# Altium PCB 中继板子.PcbDoc
Units mil, origin at the board's own origin, x right, y up, seen from the top; angles counter-clockwise.
Board outline 2494.03 x 3012.03 mil, 2 copper layers (Top Layer, Bottom Layer); 33 components, 49 nets, 200 pads, 73 vias.
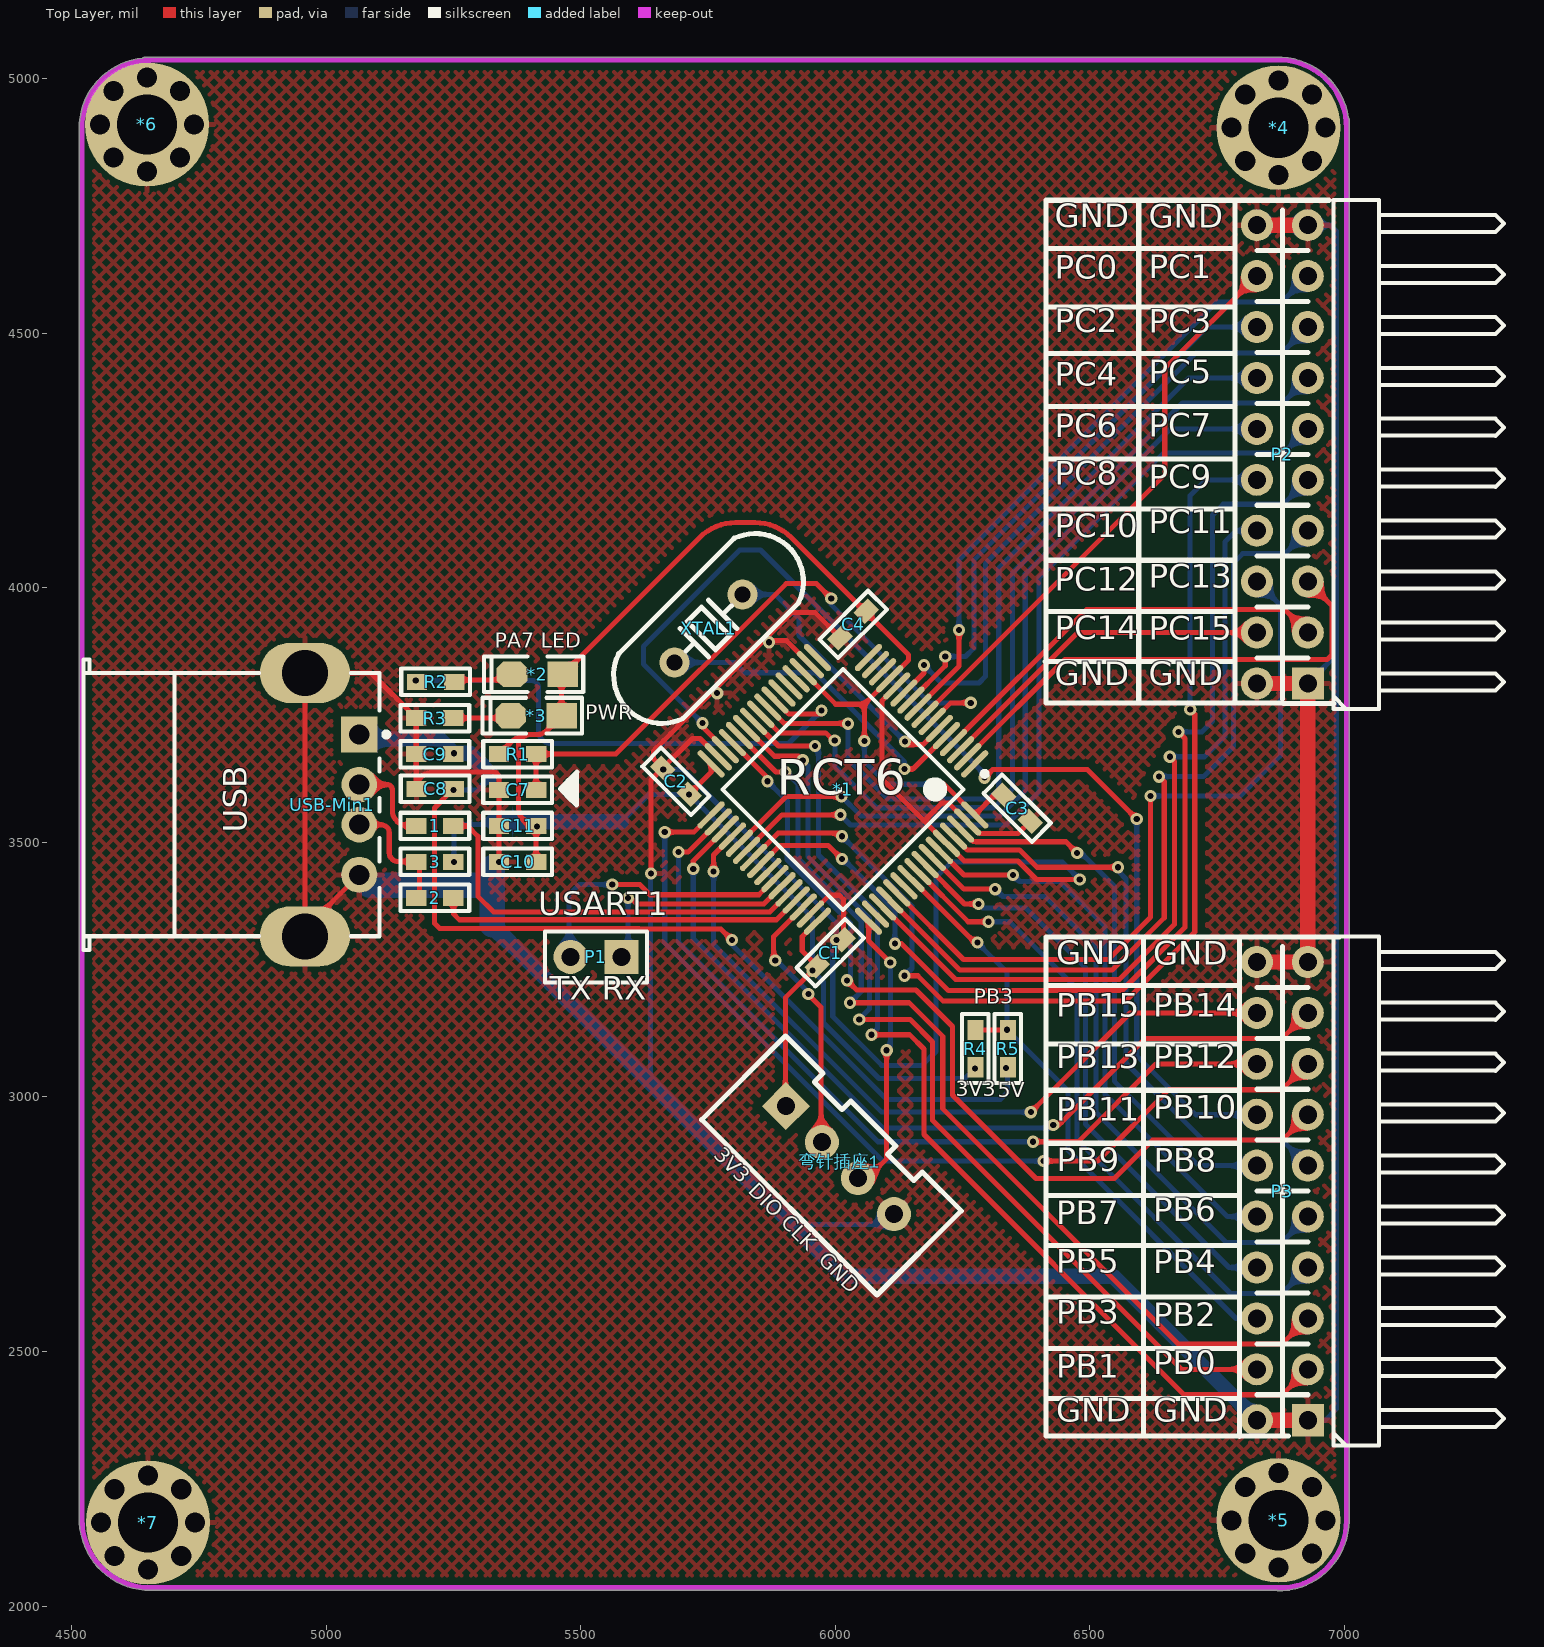
[diagram p0: Top Layer view]
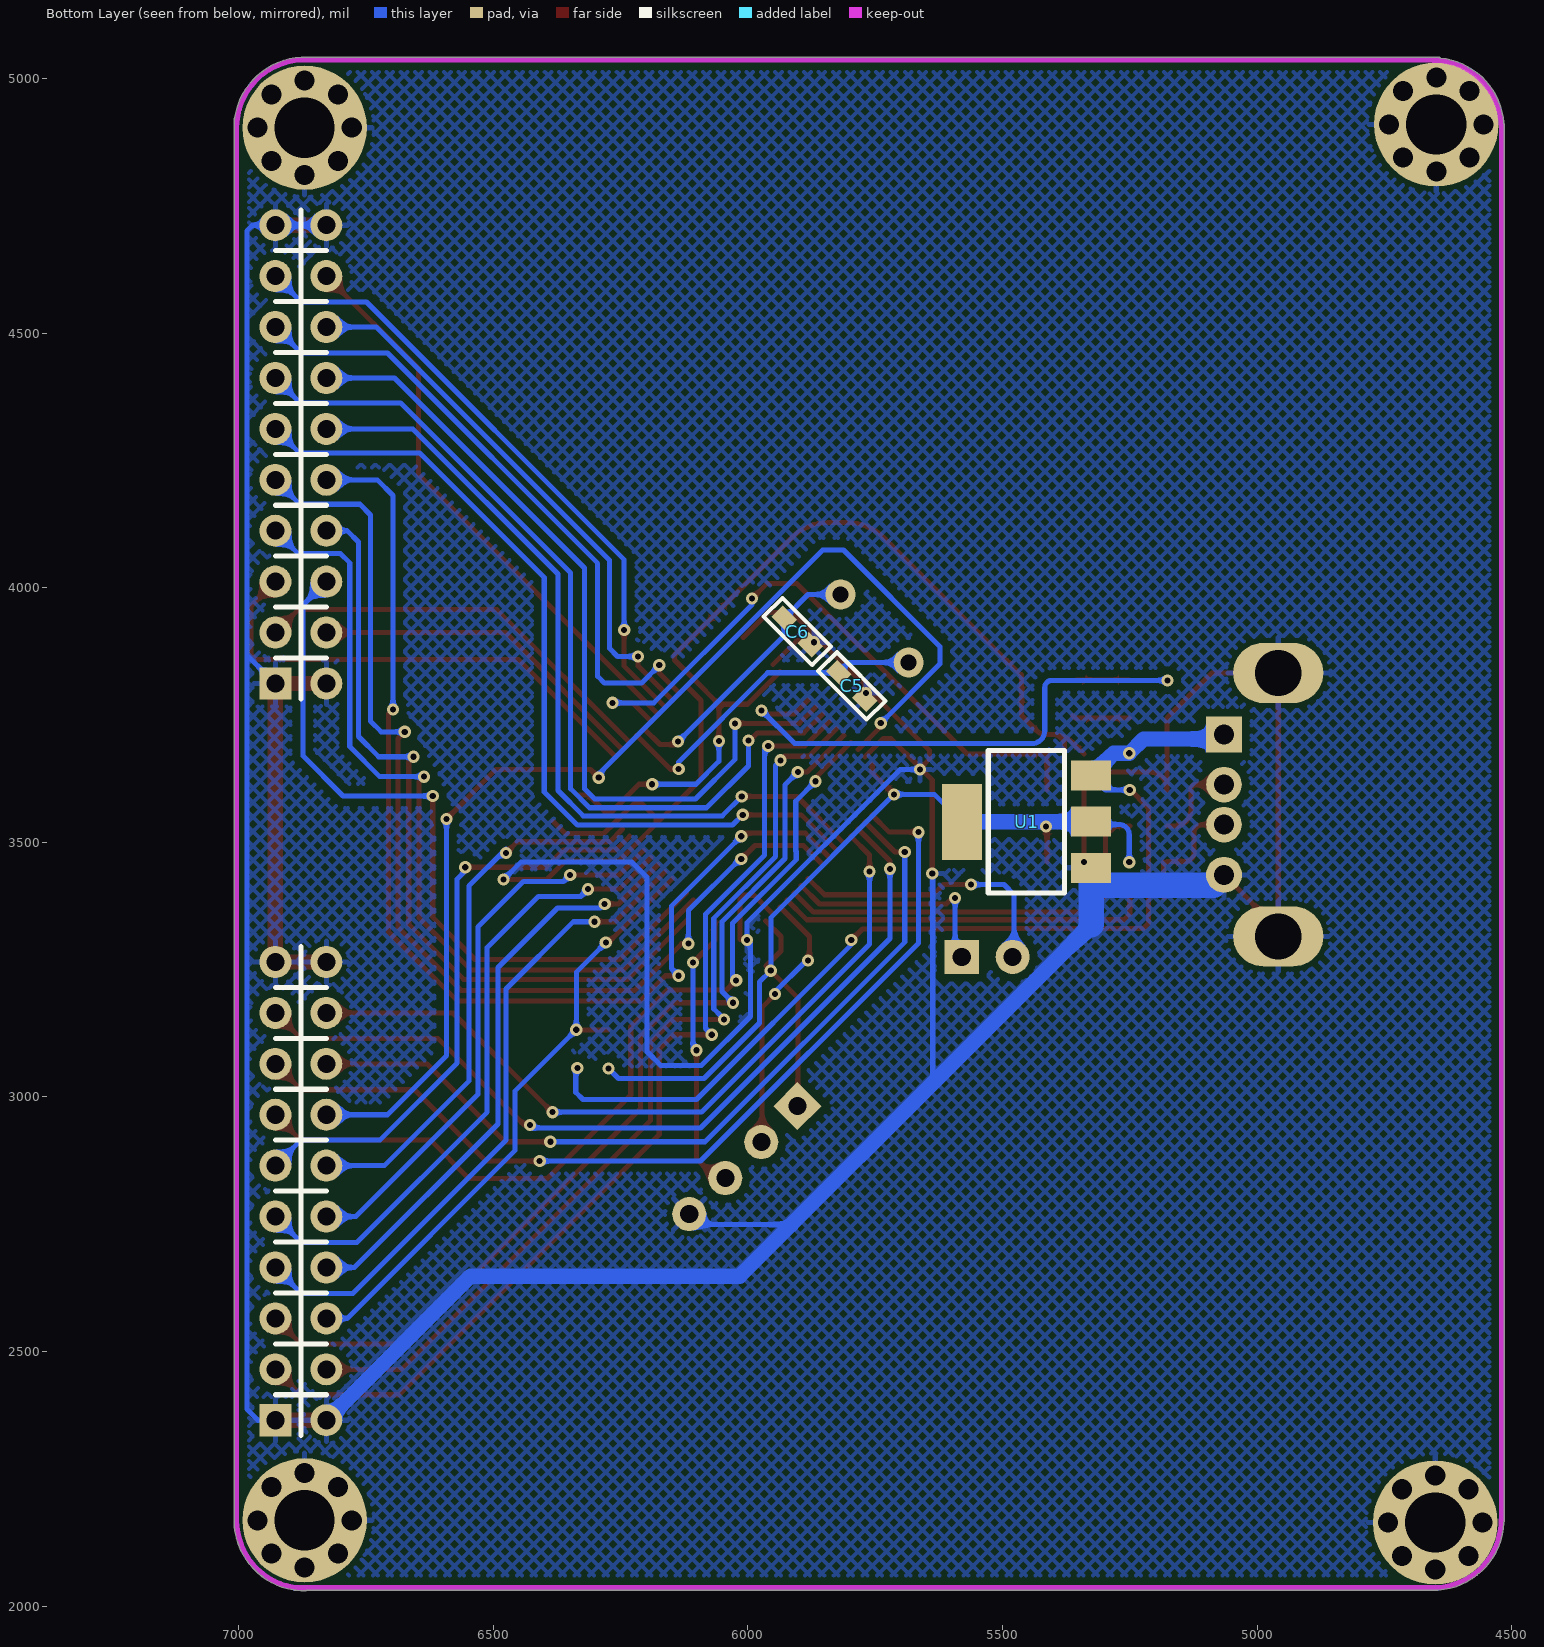
[diagram p1: Bottom Layer view, seen from below]

## Layer stack, top to bottom
Top Solder: solder mask 0.4, Solder Resist, Dk 3.5
Top Layer: signal copper 1.4
Dielectric 1: dielectric 12.6, FR-4, Dk 4.8
Bottom Layer: signal copper 1.4
Bottom Solder: solder mask 0.4, Solder Resist, Dk 3.5

## Board outline
4653.4,2030.98 ccw(c4653.42,2036) 4653.42,2030.98 6867,2030.98 ccw(c6870,2035) 6869.98,2029.99 ccw(c6870.5,2168.5) 6887.11,2030.98 6890,2030.98 ccw(c6890,2036) 6892.7,2031.78 ccw(c6870.5,2168.5) 7009,2166.66 ccw(c7004,2167) 7009.02,2167 7009.01,4902.97 7009.01,4920 ccw(c7004,4920) 7007.56,4923.53 ccw(c6870.5,4903.5) 6877.28,5041.85 ccw(c6876,5037) 6876,5042.02 4644,5042.02 ccw(c4644,5037) 4640.3,5040.39 ccw(c4653.5,4902.5) 4515.38,4912.95 ccw(c4520,4911) 4514.98,4911 4514.98,2166 ccw(c4520,2166) 4515.53,2163.74 ccw(c4653.92,2169.5) 4644.18,2031.33 ccw(c4646,2036)

## Design rules (kind name [scope] priority, off if disabled: settings)
Clearance [All] p1: gap=15
PolygonConnect [All] p1: connectstyle=Relief reliefconductorwidth=10 reliefentries=4 polygonreliefangle="90 Angle" airgapwidth=10
RoutingVias [All] p1: holewidth=12 width=24 viastyle="Through Hole" minholewidth=12 minwidth=24 maxholewidth=12 maxwidth=24
SolderMaskExpansion [All] p1: expansion=4
Width [All] p1: maxlimit=10 minlimit=10 preferedwidth=10
30 further rules are at their usual default settings.

## Components (designator, comment, footprint, x,y, rotation, side; value= is the part's Value field where it differs from the comment)
1 "22R" "R 0603" 5213.5,3532.14 r0 top
2 "22R" "R 0603" 5213.5,3390.91 r0 top
3 "Res" "R 0603" 5213.5,3461.52 r180 top
*1 "stm32F103RCT6" LQF64 6015,3604 r225 top
*2 "LED1" "LED 0805B" 5415,3830 r180 top
*3 "LED" "LED 0805B" 5412.5,3749 r180 top
*4 "定位孔" 定位孔 6870.5,4903.5 r0 top
*5 "定位孔" 定位孔 6870.5,2168.5 r0 top
*6 "定位孔" 定位孔 4648,4910 r0 top
*7 "定位孔" 定位孔 4650,2164 r0 top
C1 "104" "R 0603" 5990,3283 r225 top
C2 "104" "R 0603" 5687,3620 r315 top
C3 "104" "R 0603" 6357,3567 r135 top
C4 "104" "R 0603" 6035,3928 r45 top
C5 "22p" "R 0603" 5796,3807.22 r225 bottom
C6 "22p" "R 0603" 5903,3914 r225 bottom
C7 "Cap" "R 0603" 5376,3603 r0 top
C8 "Cap" "R 0603" 5214,3605 r0 top
C9 "Cap" "R 0603" 5213.5,3673.38 r0 top
C10 "Cap" "R 0603" 5376,3461.52 r0 top
C11 "Cap" "R 0603" 5376,3532.14 r0 top
P1 "Header 2" HDR-1x2 5580,3275 r180 top
P2 "Header 10X2" HDR-10X2_H 6928,3812 r90 top
P3 "Header 10X2" HDR-10X2_H 6928,2365 r90 top
R1 "Res2" "R 0603" 5376,3673.38 r0 top
R2 "1k" "R 0603" 5215,3815 r180 top
R3 "1k" "R 0603" 5213.5,3744 r180 top
R4 "Res2" "R 0603" 6275,3095 r270 top
R5 "Res2" "R 0603" 6339,3095 r270 top
U1 "AMS1117" AMS1117 5456,3540 r90 bottom
USB-Min1 "USB-Mini" USB-A/S_A 5065,3574 r180 top
XTAL1 "8M" "XTAL-49S DIP" 5751,3920 r225 top
弯针插座1 "弯针插座4p" XH2.54-4P 5903,2982 r315 top

## Footprints (in the part's own frame and the unit in brackets; to place one, negate y for a bottom-side part, rotate by r counter-clockwise, add the part's x,y. Pads: shape width x height; smd on the part's side, far side on the other; paste and mask are expansions set on the pad)
AMS1117 [mil]
  rect 59x79 smd: 1(-90,-130) 2(0.55,-130) 3(91.1,-130)
  rect 150x79 smd: 4(-0.12,123.54)
  silkscreen extent -139,-78 141,72
HDR-1x2 [mm] "排针，2脚"
  rect 1.7x1.7 hole 0.9: 1(0,0)
  round 1.7 hole 0.9: 2(2.54,0)
  silkscreen extent -1.27,-1.27 3.81,1.27, body extent -1.27,-1.27 3.81,1.27, height 8.5
HDR-10X2_H [mm]
  rect 1.6x1.6 hole 0.9: 1(0,0)
  round 1.6 hole 0.9: 2(0,2.54) 3(2.54,0) 4(2.54,2.54) 5(5.08,0) 6(5.08,2.54) 7(7.62,0) 8(7.62,2.54) 9(10.16,0) 10(10.16,2.54) 11(12.7,0) 12(12.7,2.54) 13(15.24,0) 14(15.24,2.54) 15(17.78,0) 16(17.78,2.54) 17(20.32,0) 18(20.32,2.54) 19(22.86,0) 20(22.86,2.54)
  silkscreen extent -1.27,-9.79 24.13,2.54, body extent -1.27,-9.96 24.13,2.89, height 5.1
"LED 0805B" [mil] "蓝色0805LED"
  rect 60x50 smd: 1(-50,0)
  oct 60x50 smd: 2(50,0)
  silkscreen extent -90,-35 105,35, body extent -39,-25 39,25, height 32
LQF64 [mm]
  oval 1.8x0.3 smd: 1(-5.55,3.75) 2(-5.55,3.25) 3(-5.55,2.75) 4(-5.55,2.25) 5(-5.55,1.75) 6(-5.55,1.25) 7(-5.55,0.75) 8(-5.55,0.25) 9(-5.55,-0.25) 10(-5.55,-0.75) 11(-5.55,-1.25) 12(-5.55,-1.75) 13(-5.55,-2.25) 14(-5.55,-2.75) 15(-5.55,-3.25) 16(-5.55,-3.75) 33(5.55,-3.75) 34(5.55,-3.25) 35(5.55,-2.75) 36(5.55,-2.25) 37(5.55,-1.75) 38(5.55,-1.25) 39(5.55,-0.75) 40(5.55,-0.25) 41(5.55,0.25) 42(5.55,0.75) 43(5.55,1.25) 44(5.55,1.75) 45(5.55,2.25) 46(5.55,2.75) 47(5.55,3.25) 48(5.55,3.75)
  oval 0.3x1.8 smd: 17(-3.75,-5.55) 18(-3.25,-5.55) 19(-2.75,-5.55) 20(-2.25,-5.55) 21(-1.75,-5.55) 22(-1.25,-5.55) 23(-0.75,-5.55) 24(-0.25,-5.55) 25(0.25,-5.55) 26(0.75,-5.55) 27(1.25,-5.55) 28(1.75,-5.55) 29(2.25,-5.55) 30(2.75,-5.55) 31(3.25,-5.55) 32(3.75,-5.55) 49(3.75,5.55) 50(3.25,5.55) 51(2.75,5.55) 52(2.25,5.55) 53(1.75,5.55) 54(1.25,5.55) 55(0.75,5.55) 56(0.25,5.55) 57(-0.25,5.55) 58(-0.75,5.55) 59(-1.25,5.55) 60(-1.75,5.55) 61(-2.25,5.55) 62(-2.75,5.55) 63(-3.25,5.55) 64(-3.75,5.55)
  silkscreen extent -5.67,-4.25 4.25,4.57, body extent -5,-5 5,5, height 1.6
"R 0603" [mil] "1/10W贴片电阻"
  rect 40x31.5 smd: 1(-36.5,0) 2(36.5,0)
  silkscreen extent -68,-26 68,26, body extent -31,-16 32,16, height 16
USB-A/S_A [mm] "A型直插母头，"
  rect 1.8x1.8 hole 1: 1(0,-3.5)
  round 1.778 hole 1: 2(0,-1) 3(0,1)
  round 1.8 hole 1: 4(0,3.5)
  oval 4.5x3 hole 2.3: 4(2.71,6.57) 4(2.71,-6.57)
  silkscreen extent -1.48,-7.25 13.75,7.25, body extent -0.6,-7.34 13.7,7.34, height 6.8
XH2.54-4P [mm] "接插件，4P"
  rect 1.7x1.7 hole 0.9: 1(0,0)
  round 1.7 hole 0.9: 2(2.54,0) 3(5.08,0) 4(7.62,0)
  silkscreen extent -2.49,-3.45 9.88,2.49, body extent -2.5,-3.3 10.12,2.4, height 7.03
"XTAL-49S DIP" [mm]
  round 1.5 hole 0.8: 1(-2.4,0) 2(2.4,0)
  silkscreen extent -5.7,-2.28 5.7,2.28, body extent -5.68,-2.35 5.67,2.3, height 3.5
定位孔 [mm]
  round 1 hole 1: 1(-2.35,0) 1(-1.662,-1.662) 1(-1.662,1.662) 1(0,-2.35) 1(0,2.35) 1(1.662,-1.662) 1(1.662,1.662) 1(2.35,0)
  round 6.2 hole 3: 1(0,0)

## Part data
1 2 R2 R3: library part Res
*2: library part LED
C1 C2 C3 C4: library part Cap
C5 C6: library part CAP
C7 C8 C9 C10 C11: "Capacitor"
P1: "Header, 2-Pin"
P2 P3: "Header, 10-Pin, Dual row"
R1 R4 R5: "Resistor"
U1: library part AMS1117_1, "3.3V电压转换器AMS1117"
XTAL1: library part XTAL32

## Via types
v1: diameter 24, hole 12, Top Layer to Bottom Layer, 73 vias

## Nets (pads, with @x,y where several pads share a name; then routed paths per layer and width w, separated by ;. In a path a pad name is that pad's centre, name@x,y a point inside that pad or via, vN(x,y) a via of type N, cw(c..) or ccw(c..) an arc to the next point about the centre after c; other vN are vias at no path point)
3V3: 3.1 *1.13 *1.19 *1.32 *1.48 *1.64 *2.1 *3.1 C1.2 C2.2 C3.2 C4.2 C10.2 C11.2 R1.1 R4.2 U1.2 弯针插座1.1 | length 4136.9
  Top Layer w10: R1.1 5361.23,3695.11 cw(c5402,3654.35) 5402,3712 5403,3712 ; C10.2 C11.2 cw(c5412.5,3566.52) 5378.12,3566.52 5378.12,3698 5384.43,3704.31 cw(c5403,3685.73) 5403,3712 ; *3.1@5452.02,3738.52 *3.1 ; v1(5712.81,3594.19) 5756.1,3637.48 *1.32 ; 弯针插座1.1@5901.93,2957.92 5901.93,3194.93 v1(5955,3248) C1.2 5935,3286.38 5935,3315.21 *1.48 ; *1.19 6000.84,3771.27 6057,3771.27 ; v1(6057,3699) 6057,3771.27 ; v1(6188,3614) 6213.79,3614 *1.64 6312.82,3592.81 C3.2 ; 5403,3712 5416,3712 ccw(c5416,3734.93) 5432.22,3718.72 *3.1 ; *3.1 5462.5,3827.5 cw(c5465,3827.5) *2.1 5733.71,4098.71 cw(c5804.42,4028) 5804.42,4128 5842.58,4128 cw(c5842.58,4028) 5913.29,4098.71 6144,3868 6144,3858.27 *1.13 6057,3771.27
  Bottom Layer w10: v1(5251,3461) 5251,3515 cw(c5271,3515) 5271,3535 5320.45,3535 U1.2 ; 5579.54,3539.88 5633.85,3594.19 v1(5712.81,3594.19) 5955,3352 v1(5955,3248) 5977,3226 5977,3145 6086,3036 6254,3036 v1(6274,3056) ; v1(6057,3699) 6057,3659 6102,3614 v1(6188,3614)
  Bottom Layer w30: U1.2 5579.54,3540.55
  other v1: 5414.45,3531
GND: *1.12 *1.18 *1.31 *1.47 *1.60 *1.63 *4.1 *5.1 *6.1 *7.1 C1.1 C2.1 C3.1 C4.1 C5.2 C6.2 C7.1 C8.1 C9.1 C10.1 C11.1 P2.1 P2.2 P2.19 P2.20 P3.1 P3.2 P3.19 P3.20 R3.2 U1.1 USB-Min1.4 弯针插座1.4 | length 11514.8
  Top Layer w10: USB-Min1.4@5065,3436.2 4958.31,3329.51 4958.31,3832.66 5088.34,3832.66 R3.2 C9.1 C8.1@5177,3602.76 ; C8.1 cw(c5210.5,3605) 5210.5,3638 5327.5,3638 cw(c5327.5,3626) 5339.5,3626 C7.1 C11.1 v1(5339.5,3461.52) ; v1(5638,3439) 5638,3622.62 C2.1 ; *1.31 5734.05,3704 5719.38,3704 C2.1 ; v1@5869.95,3896 5903.95,3896 *1.18 ; *1.47 5987.95,3396 6008,3396 6015.81,3388.19 C1.1 ; C4.1 5960.38,3951 5914,3951 5643,3680 5643,3664 C2.1 ; *1.12 6092,3778.44 6092,3624.44 6180,3536.44 ; C3.1 6358.72,3517.11 6282.85,3517.11 *1.63 6222.95,3577 6209,3577 6180,3548 6180,3536.44 ; v1(6480,3427) 6395,3427 6358.89,3463.11 6253.32,3463.11 *1.60 6180,3536.44 ; P2.19 P2.19@6956,4712
  Top Layer w30: P3.2 P3.1 ; P2.2 P2.1 P3.19 ; P2.20 P2.19 ; P3.20@6830,3265 P3.19@6930,3265
  Bottom Layer w10: v1@5637,3434.58 5637,3047.51 ccw(c5686.51,3047.51) 5651.5,3012.5 ; v1(5662,3643) 5701,3643 6002,3342 v1(6002,3308) 5995,3301 5995,3158 6091,3062 6171,3062 6198,3089 6198,3431.48 6227.52,3461 6446,3461 v1(6480,3427) ; 5914.87,2749.13 弯针插座1.4@6110.72,2749.13 ; P2.20 P2.19 6973,4712 6984,4701 6984,3868 ; P2.1 6984,3868 ; 6962,2365 6984,2387 6984,3868
  Bottom Layer w30: 5326,3338 5651.5,3012.5 5914.87,2749.13 6016,2648 6545,2648 P3.2
  Bottom Layer w50: USB-Min1.4@5065,3436.2 5085.2,3416 5326,3416 5326,3338 ; U1.1@5326,3422 U1.1
  other v1: 5768,3793 5869.95,3893
Net1_1: 1.1 USB-Min1.2 | length 175.7
  Top Layer w10: USB-Min1.2 5120,3613.37 cw(c5120,3603.37) 5130,3603.37 5130,3563 ccw(c5160.86,3563) 5160.86,3532.14 1.1
Net2_1: 2.1 3.2 USB-Min1.3 | length 242.3
  Top Layer w10: USB-Min1.3 5109,3534.63 5109,3534 cw(c5109,3519) 5124,3519 5124,3479.35 ccw(c5141,3479.35) 5141,3462.35 5176.18,3462.35 cw(c5176.18,3461.52) 3.2 ; 2.1@5182,3390.91 5183.5,3392.41 3.2@5183.5,3461.52
Net*1_42: *1.42 P1.2 | length 557.3
  Top Layer w10: v1(5562,3417) 5616,3417 5636,3397 5849.76,3397 *1.42
  Bottom Layer w10: P1.2 5477,3278 5477,3397 5497,3417 v1(5562,3417)
Net*1_43: *1.43 P1.1 | length 443.3
  Top Layer w10: v1(5593,3390.91) 5598.28,3390.91 5610.19,3379 5859.6,3379 *1.43
  Bottom Layer w10: P1.1 5593,3288 v1(5593,3390.91)
Net*2_2: *2.2 R2.1 | length 103
  Top Layer w10: R2.1@5251.5,3819 *2.2@5354.5,3819
Net*3_2: *3.2 R3.1 | length 114.1
  Top Layer w10: R3.1@5250.5,3744 5357.5,3744 *3.2
OSC_IN: *1.5 C5.1 XTAL1.2 | length 656.1
  Top Layer w10: v1(6136,3644) 6152.44,3644 *1.5
  Bottom Layer w10: XTAL1.2 5801.66,3853.19 C5.1 5960.97,3833.03 6136,3658 v1(6136,3644)
OSC_OUT: *1.6 C6.1 XTAL1.1 | length 541.4
  Top Layer w10: v1(6137,3698) 6143,3692 6172.6,3692 *1.6
  Bottom Layer w10: XTAL1.1 5881.81,3986.81 C6.1 5928.81,3906.19 v1(6137,3698)
PA7: *1.23 R2.2 | length 1037.1
  Top Layer w10: *1.23 5908.76,3752 5973,3752 v1@5975,3754
  Bottom Layer w10: v1(5176,3818) 5403,3818 cw(c5403,3804) 5417,3804 5417,3719 ccw(c5442,3719) 5442,3694 5907.95,3694 v1(5973.05,3759.1)
PA11/D-: 1.2 *1.44 | length 814
  Top Layer w10: 1.2 5277.86,3532.14 5298,3512 5298,3394 5329,3363 5871.44,3363 *1.44
PA12/D+: 2.2 *1.45 | length 725.4
  Top Layer w10: 2.2 5250,3359.52 5261.52,3348 5884.27,3348 *1.45
PB0: *1.26 P3.3 | length 2032.4
  Top Layer w10: *1.26 5888.24,3689 v1(5960,3689) ; v1(6071,3122) 6146,3122 6174,3094 6174,2926 6685,2415 6878,2415 P3.3
  Bottom Layer w10: v1(5960,3689) 5967,3682 5967,3475 6083,3359 6083,3134 v1(6071,3122)
PB1: *1.27 P3.4 | length 1854.1
  Top Layer w10: *1.27 5880.4,3669 5928,3669 v1(5936,3661) ; v1(6047,3152) 6147,3152 6191,3108 6191,2954 6680,2465 P3.4
  Bottom Layer w10: v1(5936,3661) 5946,3651 5946,3471.79 6067,3350.79 6067,3173 v1@6053,3159
PB2: *1.28 P3.5 | length 1918.5
  Top Layer w10: *1.28 5883.56,3638 v1(5901.93,3638) ; v1(6029,3185) 6145,3185 6211,3119 6211,2977 6673,2515 6878,2515 P3.5
  Bottom Layer w10: v1@5905.93,3634 5927,3612.93 5927,3468.16 6051,3344.16 6051,3207 v1(6029,3185)
PB3: *1.55 P3.6 R4.1 R5.1 | length 1235.8
  Top Layer w10: *1.55 6274.24,3303 v1(6279,3303) ; R4.1 R5.1
  Bottom Layer w10: v1(6279,3303) 6337,3245 v1(6337,3132) 6457,3012 6457,2895 6787,2565 P3.6
PB4: *1.56 P3.7 | length 1303.6
  Top Layer w10: *1.56 6261.08,3344 v1(6301,3344)
  Bottom Layer w10: v1(6301,3344) 6342.8,3344 6475,3211.8 6475,2915 6776,2614 6877,2614 P3.7
PB5: *1.57 P3.8 | length 1159.2
  Top Layer w10: *1.57 6253.92,3379 v1(6281.33,3379)
  Bottom Layer w10: v1(6281.33,3379) 6289.33,3371 6374,3371 6491,3254 6491,2947 6773,2665 P3.8
PB6: *1.58 P3.9 | length 1261.4
  Top Layer w10: *1.58 6252.76,3408 v1(6314,3408)
  Bottom Layer w10: v1(6314,3408) 6328,3394 6411.21,3394 6512,3293.21 6512,2970 6768,2714 6877,2714 P3.9
PB7: *1.59 P3.10 | length 1114.4
  Top Layer w10: *1.59 6252.6,3436 v1(6349,3436)
  Bottom Layer w10: v1(6349,3436) 6362,3423 6441.09,3423 6530,3334.09 6530,3005 6770,2765 P3.10
PB8: *1.61 P3.11 | length 1185.1
  Top Layer w10: *1.61 6259.27,3485 6362,3485 6396,3451 v1(6555,3451)
  Bottom Layer w10: v1(6555,3451) 6556.53,3451 6557,3451.47 6560,3448.47 6555.53,3444 6555.53,3443.47 6571,3428 6571,3066.79 6722.79,2915 6878,2915 P3.11
PB9: *1.62 P3.12 | length 1091.6
  Top Layer w10: *1.62 6270.77,3501.35 6275.98,3501.35 6275.98,3501.11 6452.89,3501.11 v1(6475,3479)
  Bottom Layer w10: v1(6475,3479) 6475,3487 6548,3414 6548,3031 6714,2865 P3.12
PB10: *1.29 P3.13 | length 1767.1
  Top Layer w10: *1.29 5869.95,3623.78 5870.86,3623.78 v1(5867,3619.92) ; v1(6023,3229) 6042,3210 6158.3,3210 6230,3138.3 6230,3004 6394,2840 6548,2840 6623,2915 6878,2915 P3.13
  Bottom Layer w10: v1(5867,3619.92) 5906,3580.92 5906,3483.2 5905,3482.2 5905,3466 6030,3341 6030,3236 v1(6023,3229)
PB11: *1.30 P3.14 | length 2302
  Top Layer w10: v1(5739,3734) 5739,3726.89 *1.30 ; v1(6293,3627) 6309,3643 6495,3643 v1(6592,3546)
  Bottom Layer w10: v1(5739,3734) 5623,3850 5623,3884.81 5812.19,4074 5853,4074 6293,3634 v1(6293,3627) ; v1(6592,3546) 6592,3081 6708,2965 P3.14
PB12: *1.33 P3.15 | length 1842.5
  Top Layer w10: v1(5665,3520) 5722.21,3520 *1.33 ; v1(6409,2874) 6515,2874 6655,3014 6877,3014 P3.15
  Bottom Layer w10: v1(5665,3520) 5665,3302 6093,2874 v1(6409,2874)
PB13: *1.34 P3.16 | length 1641.2
  Top Layer w10: v1(5692,3481) 5711.05,3481 *1.34 ; v1(6388,2912) 6477,2912 6630,3065 P3.16
  Bottom Layer w10: v1(5692,3481) 5692,3304 6084,2912 v1(6388,2912)
PB14: *1.35 P3.17 | length 1693.3
  Top Layer w10: v1(5721,3448) 5721,3463.11 *1.35 ; v1(6428,2945) 6439,2945 6609,3115 6878,3115 P3.17
  Bottom Layer w10: v1(5721,3448) 5721,3311 6093,2939 v1@6428,2939
PB15: *1.36 P3.18 | length 1518.7
  Top Layer w10: v1(5761,3442.53) 5761,3475.27 *1.36 ; v1@6390.81,2970 v1(6384,2970) 6579,3165 P3.18
  Bottom Layer w10: v1(5761,3442.53) 5761,3300 6091,2970 v1(6384,2970)
PC0: *1.8 P2.18 | length 1130.3
  Top Layer w10: *1.8 6647,4222.08 6647,4431 P2.18
PC1: *1.9 P2.17 | length 1238.6
  Top Layer w10: *1.9 6243,3845.92 v1(6243,3917)
  Bottom Layer w10: v1(6243,3917) 6243,4055 6749,4561 6877,4561 P2.17
PC2: *1.10 P2.16 | length 1094.8
  Top Layer w10: *1.10 6216,3846.76 v1(6216,3865)
  Bottom Layer w10: v1(6216,3865) 6255.89,3865 6272,3881.11 6272,4054 6730,4512 P2.16
PC3: *1.11 P2.15 | length 1259.3
  Top Layer w10: *1.11 6174,3832.6 v1(6174,3848)
  Bottom Layer w10: v1(6174,3848) 6174,3847.6 6208.6,3813 6282,3813 6295,3826 6295,4048 6708,4461 6877,4461 P2.15
PC4: *1.24 P2.14 | length 1673.1
  Top Layer w10: *1.24 5899.2,3733.72 6024.28,3733.72 v1(6025,3733)
  Bottom Layer w10: v1(6025,3733) 6025,3663 6103,3585 6301,3585 6321,3605 6321,4039 6694,4412 P2.14
PC5: *1.25 P2.13 | length 1777.7
  Top Layer w10: *1.25 5890.08,3715 5981,3715 5996,3700 v1(5999,3700)
  Bottom Layer w10: v1(5999,3700) 5999,3650.06 6081.06,3568 6311,3568 6348,3605 6348,4029 6682,4363 6879,4363 P2.13
PC6: *1.37 P2.12 | length 1634.1
  Top Layer w10: *1.37 5903.75,3590.18 v1(6012,3590.18)
  Bottom Layer w10: v1(6012,3590.18) 6050.18,3552 6323.37,3552 6373,3601.63 6373,4027 6658,4312 P2.12
PC7: *1.38 P2.11 | length 1708.4
  Top Layer w10: *1.38 5895.4,3554 v1(6010,3554)
  Bottom Layer w10: v1(6010,3554) 6030,3534 6335,3534 6400,3599 6400,4020.08 6644.92,4265 6881,4265 P2.11
PC8: *1.39 P2.10 | length 2184.1
  Top Layer w10: *1.39 5887.24,3518 6007,3518 v1(6013,3512) ; v1(6136,3238) 6162,3238 6212,3188 6570,3188 6706,3324 6706,3752 v1(6697,3761)
  Bottom Layer w10: v1(6013,3512) 6150.42,3374.58 6150.42,3252.42 v1(6136,3238) ; v1(6697,3761) 6697,4181 6728,4212 P2.10
PC9: *1.40 P2.9 | length 2142.2
  Top Layer w10: *1.40 5891.08,3494 5986,3494 v1(6013,3467) ; v1(6117,3301) 6130,3301 6222,3209 6563,3209 6687,3333 6687,3704 v1(6674,3717)
  Bottom Layer w10: v1(6013,3467) 6016,3467 6117,3366 v1(6117,3301) ; v1(6674,3717) 6720,3717 6741,3738 6741,4143 6762,4164 6880,4164 P2.9
PC10: *1.51 P2.8 | length 1554.4
  Top Layer w10: *1.51@6117.09,3350.07 6236.17,3231 6558,3231 6666,3339 6666,3659 v1(6657,3668)
  Bottom Layer w10: v1(6657,3668) 6725,3668 6765,3708 6765,4090 6787,4112 P2.8
PC11: *1.52 P2.7 | length 1623.7
  Top Layer w10: *1.52 6244.73,3249 6543.21,3249 6646,3351.79 6646,3619 v1(6636,3629)
  Bottom Layer w10: v1(6636,3629) 6723,3629 6782,3688 6782,4049 6800,4067 6883,4067 P2.7
PC12: *1.53 P2.6 | length 1473.5
  Top Layer w10: *1.53 6251.56,3270 6536,3270 6619,3353 v1(6619,3591)
  Bottom Layer w10: v1(6619,3591) 6795,3591 6874,3670 6874,3966 P2.6
PC13: *1.2 P2.5 | length 962.1
  Top Layer w10: *1.2 6451.03,3859.08 6966.08,3859.08 6976,3869 6976,3964 P2.5
PC14: *1.3 P2.4 | length 677.2
  Top Layer w10: *1.3 6476.11,3912 P2.4
PC15: *1.4 P2.3 | length 822.7
  Top Layer w10: *1.4 6493.27,3957 6883,3957 P2.3
RESET: *1.7 C7.2 R1.2 | length 1257.3
  Top Layer w10: C7.2 R1.2 5569,3673.38 5903.62,4008 5963,4008 v1(5992,3979) ; *1.7 6226.76,3774 v1(6266,3774)
  Bottom Layer w10: v1(5992,3979) 5992,3966.72 6184.72,3774 v1(6266,3774)
SWCLK: *1.49 弯针插座1.3 | length 571.8
  Top Layer w10: 弯针插座1.3@6041.12,2818.72 6100.84,2878.44 v1(6100.84,3091.71) ; *1.49 6065.11,3306.89 v1(6108,3264)
  Bottom Layer w10: v1(6100.84,3091.71) 6108,3098.87 v1(6108,3264)
SWDIO: *1.46 弯针插座1.2 | length 547.3
  Top Layer w10: v1(5882,3268) 5879,3271 5879,3314.89 *1.46 ; v1(5947,3202) 5947,3201.1 5972,3176.1 弯针插座1.2@5972,2888.8
  Bottom Layer w10: v1(5882,3268) 5885,3268 v1@5949,3204
VCC: C8.2 C9.2 R5.2 U1.3 USB-Min1.1 | length 1989.3
  Top Layer w10: 5222.46,3330.46 5614.61,3330.46 5615.07,3330 5775,3330 v1(5797,3308) ; 5223,3331 5213,3341 5213,3567.5 C8.2
  Bottom Layer w10: v1(5250,3603) 5297.9,3603 U1.3 ; v1(5797,3308) 5797,3299 6101,2995 6324,2995 6338,3009 v1@6338,3057
  Bottom Layer w30: USB-Min1.1 5073.8,3703 5223,3703 v1(5251,3675) 5282.1,3675 U1.3
  other v1: 6335,3057
pads on no net: *1.1 *1.14 *1.15 *1.16 *1.17 *1.20 *1.21 *1.22 *1.41 *1.50 *1.54 U1.4

## Polygon pours and split planes (outlines as drawn)
GND on Top Layer "Keep-Out Layer-No Net" (hatched 45Degree grid 20 track 8, remove dead copper, pour order 8): 4520,4903 4533,4972 4600,5031 4664,5041 6876,5041 6952,5015 6996,4960 7004,4924 7005,2158 6978,2089 6924,2050 6872,2040 4653.42,2040 4580,2061 4534,2110 4520,2187 4520,4905
GND on Bottom Layer "Keep-Out Layer-No Net" (hatched 45Degree grid 20 track 8, remove dead copper, pour order 10): 4517.17,4903.47 4530.17,4972.47 4597.17,5031.47 4661.17,5041.47 6873.17,5041.47 6949.17,5015.47 6993.17,4960.47 7001.17,4924.47 7002.17,2158.47 6975.17,2089.47 6921.17,2050.47 6869.17,2040.47 4650.59,2040.47 4577.17,2061.47 4531.17,2110.47 4517.17,2187.47 4517.17,4905.47

## Keep-outs
Keep-Out Layer:
  lines w10: 4520,2166 4520,4911 ; 4520,4903 cw(c4653.5,4902.5) 4654,5036 ; 4520.42,2170 ccw(c4653.92,2169.5) 4653.42,2036 ; 4644,5037 6307,5037 6432,5037 6438,5037 6876,5037 ; 4646,2036 6311,2036 6426.5,2036 6890,2036 ; 6870,2035 ccw(c6870.5,2168.5) 7004,2168 ; 6871,5037 cw(c6870.5,4903.5) 7004,4903 ; 7004,2167 7004,4920

## Silkscreen, mask and mechanical layers (free items; w line width, h text height)
Top Overlay:
  lines w10: 5468,3600 5468,3612 ; 5475,3621.5 5475,3591 5475,3590 5492,3573 5492,3637 5493,3638 5460,3605 5483,3582 5483,3627 ; 6412,3855 6782,3855 ; 6414,2408 6791,2408 ; 6414,2506 6791,2506 ; 6414,2607 6793,2607 ; 6414,2708 6791,2708 ; 6414,2806 6791,2806 ; 6414,2909 6794,2909 ; 6414,3104 6794,3104 ; 6414,3219 6794,3219 ; 6414,4054 6784,4054 ; 6414,4155 6782,4155 ; 6414,4253 6782,4253 ; 6414,4460 6785,4460 ; 6414,4551 6785,4551 ; 6414,4666 6785,4666 ; 6416,3013 6794,3013 ; 6416,3953 6782,3953 ; 6417,4356 6785,4356 ; 6596,3775 6596,4760 ; 6605,2334 6605,3313 ; 6785,3775 6785,4759 ; 6794,2333 6794,3312 ; 6879,3774 6414,3774 6414,4761 6970,4761 ; 6880,3773 6979,3773 ; 6890,2334 6414,2334 6414,3314 6990,3314
  text "GND" at 6431,4692 h80
  text "GND" at 6616,4691 h80
  text "PC1" at 6616,4592 h80
  text "PC0" at 6431,4591 h80
  text "PC2" at 6431,4486 h80
  text "PC3" at 6616,4485 h80
  text "PC5" at 6616,4386 h80
  text "PC4" at 6431,4381 h80
  text "PC7" at 6616,4281 h80
  text "PC6" at 6431,4280 h80
  text "PC8" at 6431,4187 h80
  text "PC9" at 6616,4180 h80
  text "PC11" at 6616,4091 h80
  text "PC10" at 6431,4083 h80
  text "PC13" at 6616,3984 h80
  text "PC12" at 6431,3978 h80
  text "PC14" at 6431,3883 h80
  text "PC15" at 6616,3882 h80
  text "PA7 LED" at 5331,3872 h50
  text "GND" at 6431,3793 h80
  text "GND" at 6616,3793 h80
  text "PWR" at 5509,3731 h50
  text "RCT6" at 5885,3570 h120
  text "USB" at 4859.72,3519 h80 r90
  text "USART1" at 5417,3341 h80
  text "GND" at 6434,3245 h80
  text "GND" at 6624,3244 h80
  text "TX" at 5439,3175 h80
  text "RX" at 5541,3175 h80
  text "PB3" at 6272,3173 h50
  text "PB15" at 6434,3142 h80
  text "PB14" at 6624,3142 h80
  text "PB13" at 6434,3041 h80
  text "PB12" at 6624,3041 h80
  text "3V3" at 6236.17,2991 h50
  text "5V" at 6319,2990 h50
  text "PB10" at 6624,2941 h80
  text "PB11" at 6434,2937 h80
  text "3V3" at 5752,2877 h50 r315
  text "PB9" at 6435,2838 h80
  text "PB8" at 6625,2837 h80
  text "DIO" at 5820,2807 h50 r315
  text "CLK" at 5884,2744 h50 r315
  text "PB6" at 6624,2740 h80
  text "PB7" at 6434,2734 h80
  text "GND" at 5958,2670 h50 r315
  text "PB5" at 6434,2639 h80
  text "PB4" at 6624,2637.77 h80
  text "PB3" at 6434,2539 h80
  text "PB2" at 6624,2534 h80
  text "PB0" at 6624,2440 h80
  text "PB1" at 6434,2433 h80
  text "GND" at 6434,2346 h80
  text "GND" at 6624,2346 h80